# EAGLE board motorModule-0.2 (EAGLE 7.6.0)
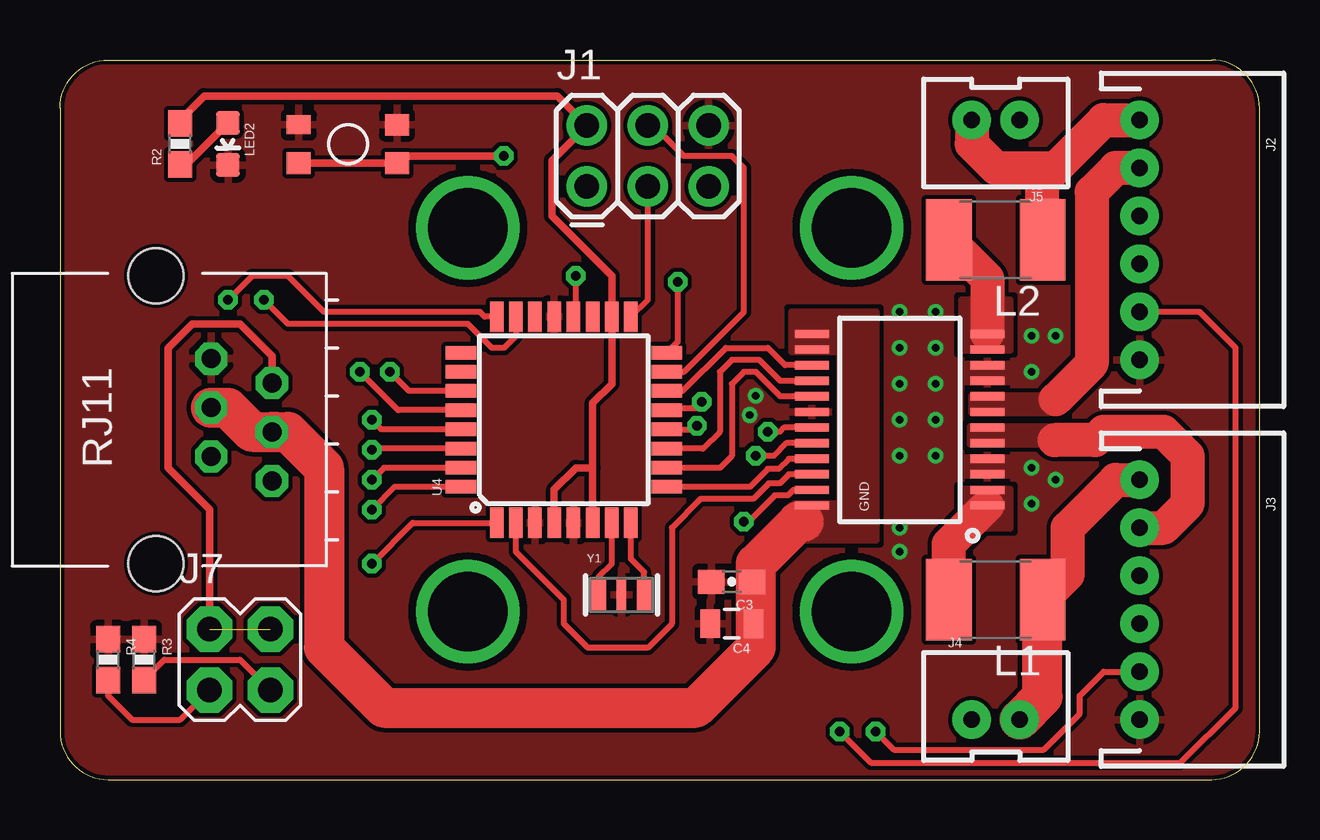
[diagram p0: board, top side]
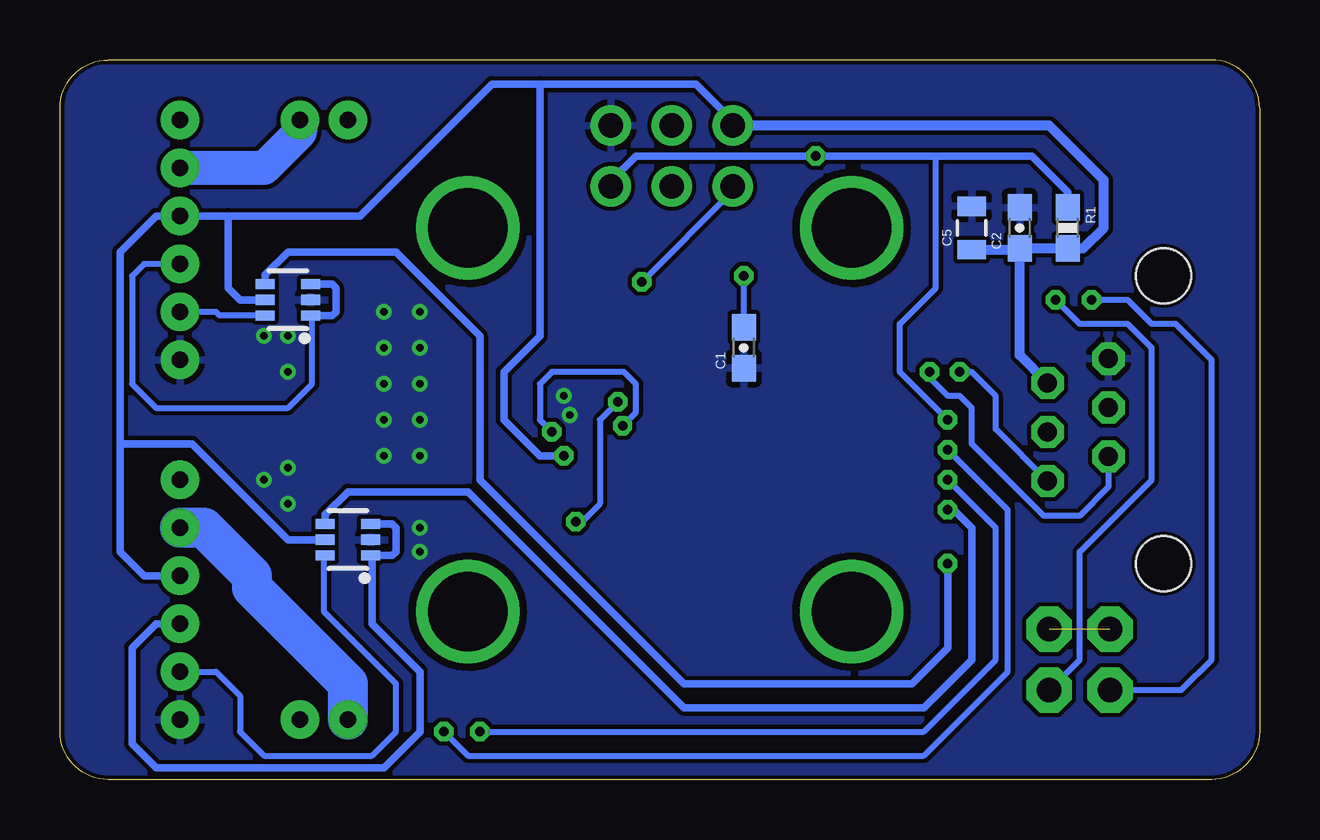
[diagram p1: board, bottom side, seen from below]

Size 50 x 30 mm. Coordinates in mm from the lower left corner, seen from the top.
Outline: 50,2 50,28 arc90 48,30 2,30 arc90 0,28 0,2 arc90 2,0 48,0 arc90 50,2
Copper layers (1*16): Top 0.035mm / dielectric 1.5mm / Bottom 0.035mm
Design rules "SparkFun-2-layer-TIGHT": minimum track width 7mil, minimum drill 15mil, track to track 7mil, track to pad 7mil, pad to pad 7mil, via to via 7mil, smd to smd 7mil, copper to edge 7mil, drill to drill 7mil, minimum pad ring 7mil, minimum via ring 7mil, stop-mask expansion 4mil, vias tented up to drill 25mil, thermal gap 10mil

## Footprints (pad centres in the part's own frame; a part is rotated, then mirrored left to right if it is on the bottom)
0603-CAP = smd 1.1 x 1: 1 -0.85,0; 2 0.85,0
0805 = smd 0.8 x 1.2: 1 -0.9,0; 2 0.9,0
SSOP24 = smd 0.348 x 1.397: 1 -3.575,-3.656; 2 -2.925,-3.656; 3 -2.275,-3.656; 4 -1.625,-3.656; 5 -0.975,-3.656; 6 -0.325,-3.656; 7 0.325,-3.656; 8 0.975,-3.656; 9 1.625,-3.656; 10 2.275,-3.656; 11 2.925,-3.656; 12 3.575,-3.656; 13 3.575,3.656; 14 2.925,3.656; 15 2.275,3.656; 16 1.625,3.656; 17 0.975,3.656; 18 0.325,3.656; 19 -0.325,3.656; 20 -0.975,3.656; 21 -1.625,3.656; 22 -2.275,3.656; 23 -2.925,3.656; 24 -3.575,3.656
STAND-OFF-PLATED = drill 3.302: P$1 0,0
2X3 = drill 1.016 pad 1.676: 1 -2.54,-1.27; 2 -2.54,1.27; 3 0,-1.27; 4 0,1.27; 5 2.54,-1.27; 6 2.54,1.27
JST-PH-6-TH = drill 0.7 pad 1.6: 1 -5,0; 2 -3,0; 3 -1,0; 4 1,0; 5 3,0; 6 5,0
JST-2-PTH-VERT = drill 0.7 pad 1.6: 1 -1,0; 2 1,0
2X2 = drill 1.016 pad 1.88 octagon: 1 -1.27,-1.27; 2 -1.27,1.27; 3 1.27,-1.27; 4 1.27,1.27
L1812 = smd 1.9 x 3.4: 1 -1.95,0; 2 1.95,0
LED-0603 = smd 1 x 1: A 0,-0.877; C 0,0.877
0603-RES = smd 1.1 x 1: 1 -0.85,0; 2 0.85,0
RJ11-6P6C = drill 0.8 pad 1.35 octagon: 1 2.55,4.84; 2 1.53,2.3; 3 0.51,4.84; 4 -0.51,2.3; 5 -1.53,4.84; 6 -2.55,2.3 | hole 2.3: -6,0; 6,0
TACTILE_SWITCH_SMD-3 = smd 1 x 0.8: 1 -2.05,0.8 | smd 1 x 0.9: 2 2.05,0.8; 3 -2.05,-0.8; 4 2.05,-0.8
SOT363 = smd 0.42 x 0.8: 1 -0.65,-0.95; 2 0,-0.95; 3 0.65,-0.95; 4 0.65,0.95; 5 0,0.95; 6 -0.65,0.95
TQFP32-08 = smd 1.27 x 0.559: 1 -4.293,2.8; 2 -4.293,2; 3 -4.293,1.2; 4 -4.293,0.4; 5 -4.293,-0.4; 6 -4.293,-1.2; 7 -4.293,-2; 8 -4.293,-2.8; 17 4.293,-2.8; 18 4.293,-2; 19 4.293,-1.2; 20 4.293,-0.4; 21 4.293,0.4; 22 4.293,1.2; 23 4.293,2; 24 4.293,2.8 | smd 0.559 x 1.27: 9 -2.8,-4.293; 10 -2,-4.293; 11 -1.2,-4.293; 12 -0.4,-4.293; 13 0.4,-4.293; 14 1.2,-4.293; 15 2,-4.293; 16 2.8,-4.293; 25 2.8,4.293; 26 2,4.293; 27 1.2,4.293; 28 0.4,4.293; 29 -0.4,4.293; 30 -1.2,4.293; 31 -2,4.293; 32 -2.8,4.293
RESONATOR-MURATA = smd 0.6 x 1.3: 1 -0.95,0; 3 0.95,0 | smd 0.4 x 1.3: 2 0,0

## Placement (x,y rotation side)
C1  0.1uF  [0603-CAP]  21.5,18 90 bottom
C2  0.1uF  [0603-CAP]  10,23 90 bottom
C3  0.1uF  [0603-CAP]  28,8.25 180 top
C4  10uF  [0805]  28,6.5 180 top
C5  10uF  [0805]  12,23 90 bottom
GND  TB6612FNG  [SSOP24]  35,15 90 top
H1  STAND-OFFPLATED  [STAND-OFF-PLATED]  17,23 0 top
H2  STAND-OFFPLATED  [STAND-OFF-PLATED]  17,7 0 top
H3  STAND-OFFPLATED  [STAND-OFF-PLATED]  33,7 0 top
H4  STAND-OFFPLATED  [STAND-OFF-PLATED]  33,23 0 top
J1  AVR_SPI_PRG_6PTH  [2X3]  24.5,26 0 top
J2  [JST-PH-6-TH]  45,22.5 270 top
J3  [JST-PH-6-TH]  45,7.5 270 top
J4  [JST-2-PTH-VERT]  39,2.5 0 top
J5  [JST-2-PTH-VERT]  39,27.5 180 top
J7  [2X2]  7.5,5 0 top
L1  [L1812]  39,7.5 180 top
L2  [L1812]  39,22.5 180 top
LED2  STAT2-GREEN  [LED-0603]  7,26.5 180 top
R1  10k  [0603-RES]  8,23 270 bottom
R2  200  [0603-RES]  5,26.5 90 top
R3  10k  [0603-RES]  3.5,5 270 top
R4  10k  [0603-RES]  2,5 270 top
RJ11  [RJ11-6P6C]  4,15 270 top
SW1  [TACTILE_SWITCH_SMD-3]  12,26.5 0 top
U1  [SOT363]  40.5,20 90 bottom
U3  [SOT363]  38,10 90 bottom
U4  ATMEGA328P_TQFP  [TQFP32-08]  21,15 90 top
Y1  RESONATOR  [RESONATOR-MURATA]  23.4,7.7 0 top

## Library data of the parts
C1-C5 = SparkFun-Capacitors
GND = SparkFun-PowerIC; PROD_ID: IC-09363
H1-H4 J1-J5 J7 RJ11 SW1 U1 U3 Y1 = Robotois
L1 L2 = arduino_Uno_Rev3-02-TH
LED2 = SparkFun-LED
R1-R4 = SparkFun-Resistors
U4 = SparkFun-DigitalIC; PROD_ID: IC-09069

## Nets
A0: J7.3 R3.2 U4.23
A1: J7.1 R4.2 U4.24
AIN1: GND.21 U4.9
AIN2: GND.22 U4.2
AREF: C1.2 U4.20
BIN1: GND.17 U4.10
BIN2: GND.16 U4.11
GND: C1.1 C2.2 C3.2 C4.2 C5.2 GND.3 GND.4 GND.9 GND.10 GND.18 J1.6 J2.6 J3.6 LED2.C R3.1 R4.1 RJ11.6 SW1.1 SW1.2 U1.2 U3.2 U4.3 U4.5 U4.21 Y1.2
MA_ENC_INT: U3.4 U4.32
MA_FA: GND.1 GND.2 L1.2
MA_M1: J3.1 J4.2 L1.1
MA_M2: GND.5 GND.6 J3.2 J4.1
MA_OUTA: J3.4 U3.1 U3.3
MA_OUTB: J3.5 U3.6 U4.30
MB_ENC_INT: U1.4 U4.1
MB_FB: GND.11 GND.12 L2.2
MB_M1: J2.1 J5.2 L2.1
MB_M2: GND.7 GND.8 J2.2 J5.1
MB_OUTA: J2.4 U1.1 U1.3
MB_OUTB: J2.5 U1.6 U4.31
MISO: J1.1 U4.16
MOSI: J1.4 U4.15
N$1: U4.7 Y1.1
N$2: U4.8 Y1.3
N$3: LED2.A R2.1
PWMA: GND.23 U4.13
PWMB: GND.15 U4.14
RESET: J1.5 R1.1 SW1.3 SW1.4 U4.29
SCK: J1.3 U4.17
SCL: RJ11.1 U4.28
SDA: RJ11.2 U4.27
STBY: GND.19 U4.12
VCC: C2.1 C5.1 GND.20 J1.2 J2.3 J3.3 J7.2 J7.4 R1.2 R2.2 RJ11.5 U1.5 U3.5 U4.4 U4.6 U4.18
VM: C3.1 C4.1 GND.13 GND.14 GND.24 RJ11.3 RJ11.4

## Tracks (layer width: path | path; a pad name or v marks a point on that pad's centre or on a via)
A0  (via drill 0.4 pad 0.8)
  Top 0.254: R3.2 4.35,5 7.5,5 J7.3 | U4.23 19,18.5 18.5,18 18,18 17,19 9.5,19 v8.5,20
  Bottom 0.254: J7.3 7.5,5 7.5,9.5 4.5,12.5 4.5,18 5.5,19 7.5,19 v8.5,20
A1  (via drill 0.4 pad 0.8)
  Top 0.254: R4.2 2,3.5 3,2.5 5,2.5 J7.1 | U4.24 17.71,19.29 17.5,19.5 11,19.5 9.5,21 8,21 v7,20
  Bottom 0.254: J7.1 3.27,3.73 2,5 2,17.5 3.5,19 4.5,19 5.5,20 v7,20
AIN1
  Top 0.254: GND.21 30.38,13.38 29.95,12.95 29.5,12.95 28.75,12.2 U4.9
AIN2
  Top 0.254: GND.22 30.38,12.72 30,12.35 29.55,12.35 28.9,11.7 26.7,11.7 25.5,10.5 25.5,6.5 24.5,5.5 22,5.5 21,6.5 21,7.5 19,9.5 U4.2
AREF  (via drill 0.4 pad 0.8)
  Top 0.254: U4.20 21.5,19.39 v21.5,21
  Bottom 0.254: C1.2 v21.5,21
BIN1
  Top 0.254: GND.17 30.02,15.97 29,17 28.5,17 28,16.5 28,13.5 27.5,13 U4.10
BIN2
  Top 0.254: GND.16 30.02,16.62 29.15,17.5 28,17.5 27.5,17 27.5,14.5 26.8,13.8 U4.11
GND  (via drill 0.3)
  other vias: 41.5,18.5 40.5,18.5 40.5,17 36.5,19.5 35,19.5 35,18 36.5,18 36.5,16.5 35,16.5 35,15 36.5,15 35,13.5 36.5,13.5 35,10.5 35,9.5 40.5,13 41.5,12.5 40.5,11.5 29,16 28.75,15.2
  pour Top (rank 2): -1,33 -1,-1 51,-1 51,33
  pour Bottom: -2,34 -2,-2 52,-2 52,34
  pour Top (no thermals): 37.5,17.3 37.5,16.6 40,16.6 40,17.3
  pour Top (no thermals): 37.5,13.4 37.5,12.7 40,12.7 40,13.4
MA_ENC_INT  (via drill 0.4 pad 0.8)
  Top 0.254: U4.32 13.95,12.2 v13,11.25
  Bottom 0.305: U3.4 38.95,11.05 38,12 33,12 24,3 14,3 12,5 12,10.5 12.75,11.25 v13,11.25
MA_FA
  Top 1.422: L1.2 37.05,9.82 GND.1
  pour Top (no thermals): 37.6,12.1 37.6,10.5 39.6,10.5 39.6,12.1
MA_M1
  Top 1.422: L1.1 42,8.55 42,10.5 44,12.5 J3.1
  Top 1.676: J4.2 40.95,3.45 L1.1
MA_M2
  Top 1.422: J3.2 46,10.5 47,11.5 47,13.5 46,14.5 43.5,14.5 43.15,14.15 41.45,14.15
  Bottom 1.676: J4.1 38,4 42,8 42,8.5 44,10.5 J3.2
  pour Top (no thermals): 37.95,14.7 37.95,14 41.5,14 41.5,14.7
MA_OUTA
  Bottom 0.305: J3.4 46,6.5 47,5.5 47,1.5 46,0.5 36.5,0.5 35,2 35,4.5 37,6.5 37,9.3 U3.1 36.15,9.35 36,9.5 36,10.5 36.15,10.65 U3.3
MA_OUTB  (via drill 0.4 pad 0.8)
  Top 0.254: v34,2 34.75,1.25 41,1.25 42.5,2.75 42.5,3.5 43.5,4.5 J3.5 | U4.30 13.05,13.8 v13,13.75
  Bottom 0.254: J3.5 43.5,4.5 42.5,3.5 42.5,2 41.5,1 37,1 36,2 36,4 39,7 39,9.3 | v34,2 33,1 14,1 10.5,4.5 10.5,11.25 v13,13.75
  Bottom 0.305: 39,9.3 U3.6
MB_ENC_INT  (via drill 0.4 pad 0.8)
  Top 0.254: U4.1 14.71,10.71 v13,9
  Bottom 0.305: U1.4 41.45,21.05 40.5,22 36,22 32.5,18.5 32.5,12.5 24,4 14.5,4 13,5.5 v13,9
MB_FB
  Top 1.422: L2.2 38.66,20.89 GND.12
  pour Top (no thermals): 37.6,20 37.6,17.9 39.6,17.9 39.6,20
MB_M1
  Top 1.422: L2.1 40.95,24.95 41.5,25.5 | 41.5,25.5 43.5,27.5 J2.1 | J5.2 38,26.5 39,25.5 41.5,25.5
MB_M2
  Top 1.422: J2.2 44,25.5 43,24.5 43,17.35 41.5,15.85
  Bottom 1.422: J5.1 40,27 41.5,25.5 J2.2
  pour Top (no thermals): 38,16 38,15.3 41.5,15.3 41.5,16
MB_OUTA
  Bottom 0.254: J2.4 46.5,21.5 47,21 47,16.5 46,15.5 40.5,15.5 39.5,16.5 39.5,19.3 U1.1
  Bottom 0.305: U1.3 38.65,20.65 38.5,20.5 38.5,19.5 38.65,19.35 U1.1
MB_OUTB  (via drill 0.4 pad 0.8)
  Top 0.254: v32.5,2 33.8,0.7 46.7,0.7 49,3 49,18 47.5,19.5 J2.5 | U4.31 13.5,13 v13,12.5
  Bottom 0.254: U1.6 43.35,19.35 43.5,19.5 J2.5 | v32.5,2 14,2 11,5 11,10.5 v13,12.5
MISO  (via drill 0.4 pad 0.8)
  Top 0.254: U4.16 25.75,18.26 v25.75,20.75
  Bottom 0.254: v25.75,20.75 21.96,24.54 J1.1
MOSI
  Top 0.254: J1.4 24.73,27.27 26,26 28,26 28.5,25.5 28.5,19.5 26,17 U4.15
N$1
  Top 0.254: Y1.1 22.45,8.45 23,9 U4.7
N$2
  Top 0.254: Y1.3 24.35,8.65 23.8,9.2 U4.8
N$3
  Top 0.305: R2.1 5.27,25.65 LED2.A
PWMA  (via drill 0.4 pad 0.8)
  Top 0.254: GND.23 30.57,12.07 30.35,11.85 29.8,11.85 28.7,10.75 v28.5,10.75 | U4.13 25.4,15.4 25.5,15.5 26.5,15.5 v26.75,15.75
  Bottom 0.254: v26.75,15.75 27.5,15 27.5,11.5 28.25,10.75 v28.5,10.75
PWMB
  Top 0.254: GND.15 30.23,17.27 29.5,18 27.75,18 25.95,16.2 U4.14
RESET  (via drill 0.4 pad 0.8)
  Top 0.254: U4.29 13.4,14.6 v13,15
  Top 0.305: SW1.3 SW1.4 14.35,26 v18.5,26
  Bottom 0.254: v13,15 15,17 15,19 13.5,20.5 13.5,26
  Bottom 0.305: J1.5 27.04,24.96 26,26 v18.5,26 13.5,26 9.5,26 8,24.5 R1.1
SCK
  Top 0.254: U4.17 24.5,19.99 J1.3
SCL  (via drill 0.4 pad 0.8)
  Top 0.254: U4.28 14.1,15.4 v12.5,17
  Bottom 0.254: RJ11.1 11,14.61 11,16 12,17 v12.5,17
SDA  (via drill 0.4 pad 0.8)
  Top 0.254: U4.27 14.55,16.2 v13.75,17
  Bottom 0.254: RJ11.2 6.3,12.2 7.5,11 9,11 12,14 12,15.5 12.5,16 13,16 13.75,16.75 v13.75,17
STBY  (via drill 0.4 pad 0.8)
  Top 0.254: GND.19 30.18,14.68 30,14.5 v29.5,14.5 | U4.12 26.4,14.6 v26.55,14.75
  Bottom 0.254: v29.5,14.5 30,15 30,16.5 29.5,17 26.5,17 26,16.5 26,15.3 v26.55,14.75
VCC  (via drill 0.4 pad 0.8)  (1 unrouted)
  Top 0.254: GND.20 30.27,14.03 29.75,13.5 v29,13.5
  Top 0.305: R2.2 5,27.5 6,28.5 20.73,28.5 J1.2 20.5,25.81 20.5,23.5 23,21 U4.18 23,16.5 22.2,15.7 22.2,13 | U4.6 22.2,13 | U4.4 20.6,12.1 21.5,13 22.2,13 | J7.2 6.23,11.27 4.5,13 4.5,18 5.5,19 7.5,19 8.84,17.66 RJ11.5
  Bottom 0.305: U1.5 42.5,20 43,20.5 43,23.5 | 43,23.5 J2.3 46,23.5 47.5,22 47.5,14 | 43,23.5 37.5,23.5 32,29 30,29 | 30,29 23.5,29 21.96,27.46 J1.2 | J3.3 46.5,8.5 47.5,9.5 47.5,14 | U3.5 40.5,10 44.5,14 47.5,14 | v29,13.5 30,13.5 31.5,15 31.5,17 30,18.5 30,29
  Bottom 0.406: RJ11.5 10,17.69 C2.1 | J1.2 8.77,27.27 6.5,25 6.5,23 7.35,22.15 R1.2 C2.1 | C5.1 10.05,22.1 C2.1
VM
  Top 0.254: C3.1 29,8.4 29,8.5 | C4.1 29,6.4 29,6
  Top 1.676: 9.01,14.49 RJ11.3 | 31,10.75 30.75,10.75 29,9 29,8.5 29,6 29,5.5 26.5,3 13.5,3 11,5.5 11,13 9.51,14.49 RJ11.3 | RJ11.4 6.99,15.51 8.01,14.49 RJ11.3
  pour Top (no thermals): 34,19.5 34,17.85 30.5,17.85 30.5,19.5
  pour Top (no thermals): 30.5,11.5 30.5,10 34,10 34,19 32.5,19 32.5,11.5